# Altium PCB SensorRig.PcbDoc
Units mil, origin at the board's own origin, x right, y up, seen from the top; angles counter-clockwise.
Board outline 1023.62 x 1358.27 mil, 2 copper layers (Top Layer, Bottom Layer); 29 components, 26 nets, 119 pads, 5 vias.
Unrouted connection lines stored in the file: 65.
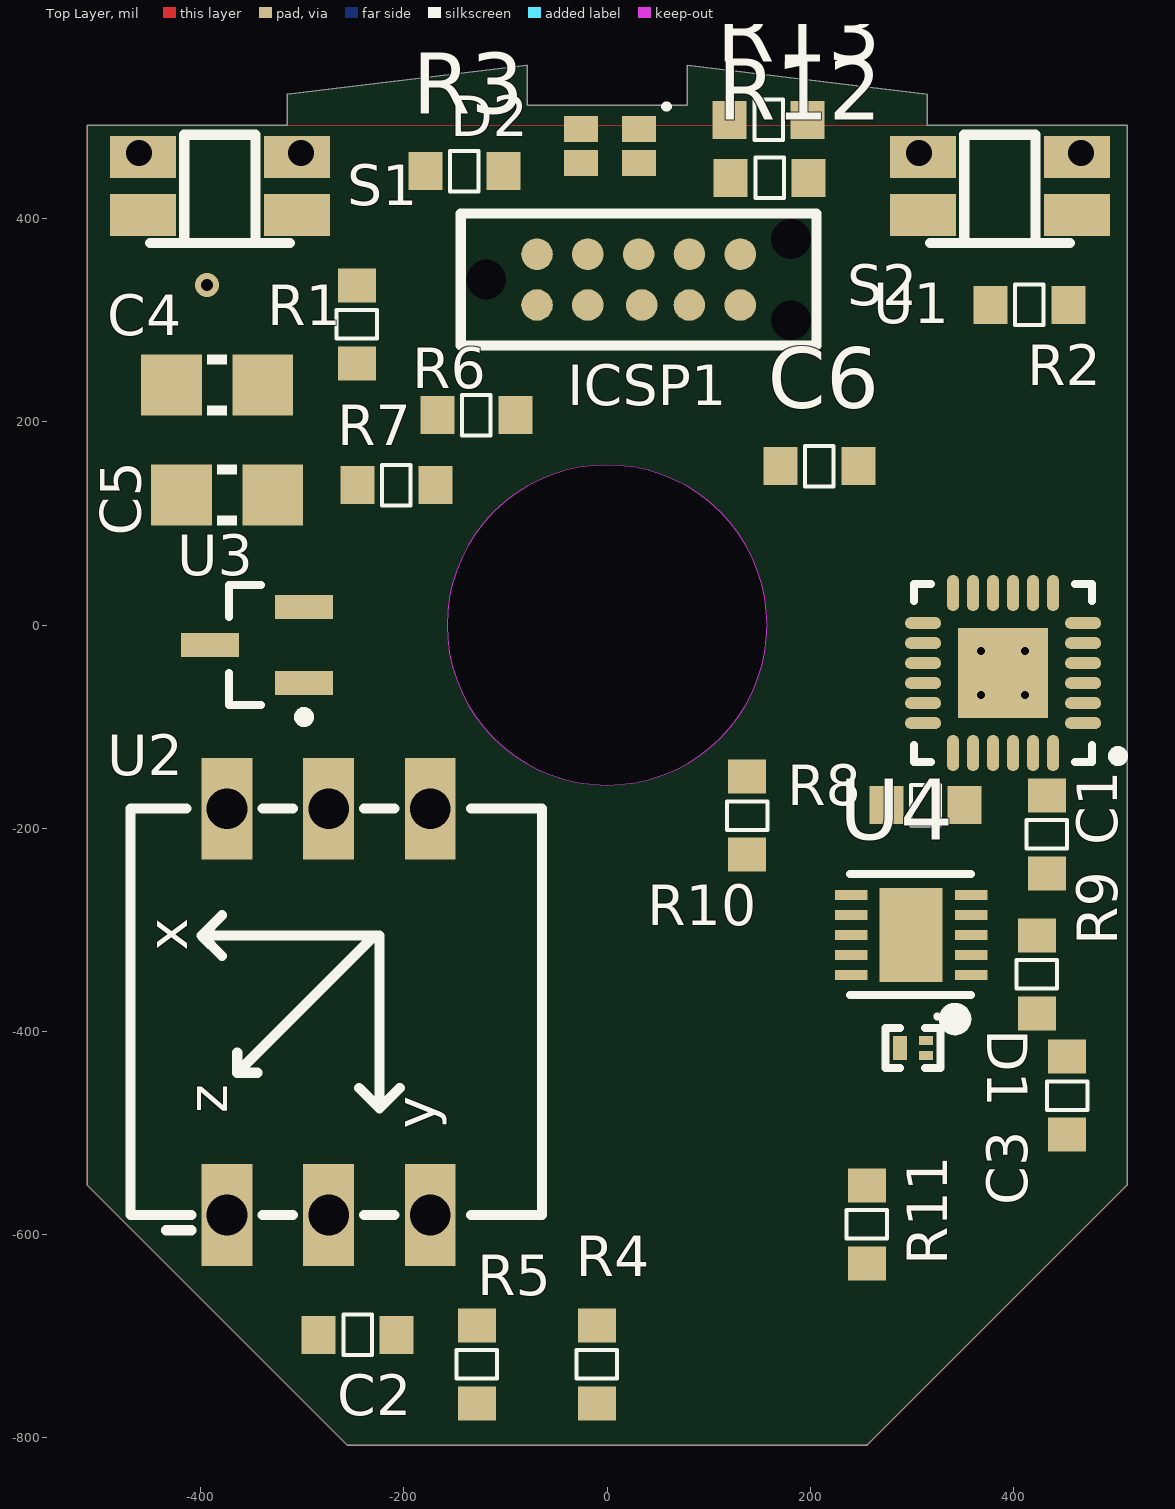
[diagram p0: Top Layer view]
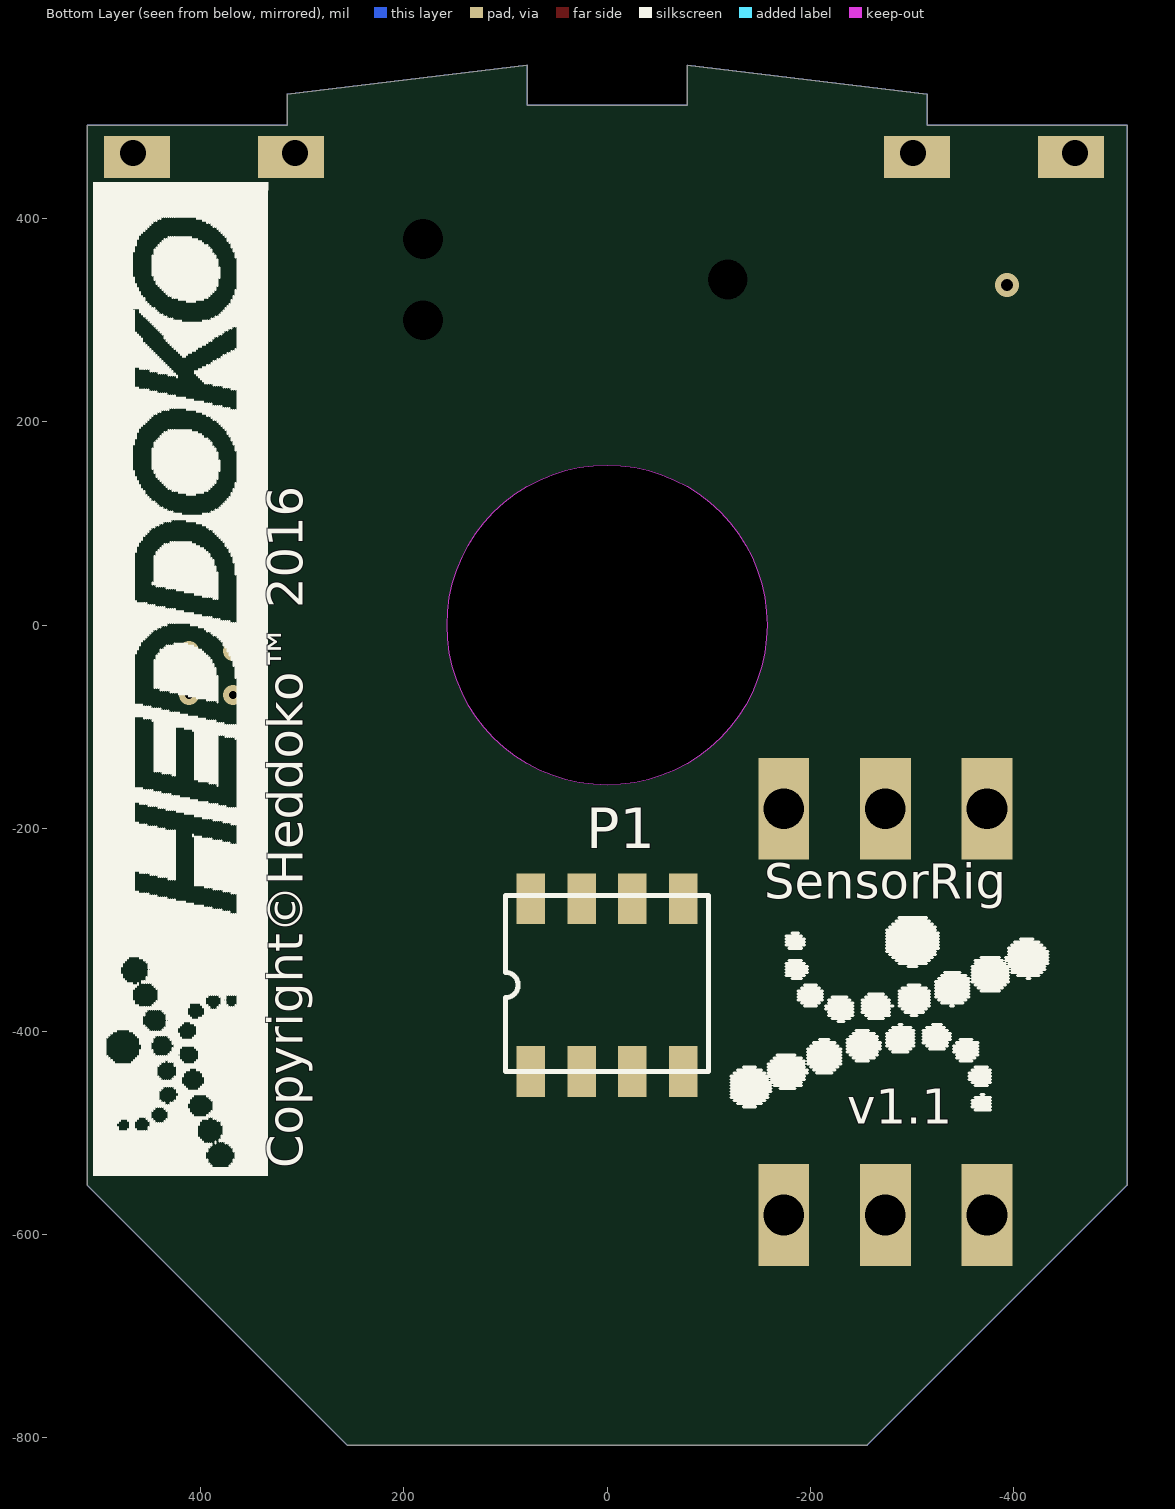
[diagram p1: Bottom Layer view, seen from below]

## Layer stack, top to bottom
Top Solder: solder mask 0.4, Solder Resist, Dk 3.5
Top Layer: signal copper 1.4
Dielectric 1: dielectric 12.6, FR-4, Dk 4.8
Bottom Layer: signal copper 1.4
Bottom Solder: solder mask 0.4, Solder Resist, Dk 3.5

## Board outline
511.81,492.13 511.81,-551.18 255.91,-807.09 -255.91,-807.09 -511.81,-551.18 -511.81,492.13 -314.96,492.13 -314.96,522.18 -78.74,551.18 -78.74,511.81 78.74,511.81 78.74,551.18 314.96,522.18 314.96,492.13
cut-out: -157.48,0 ccw(c0,0) 0,-157.48 ccw(c0,0) 157.48,0 ccw(c0,0) 0,157.48 ccw(c0,0)

## Design rules (kind name [scope] priority, off if disabled: settings)
Clearance [All] p1: gap=8
PlaneConnect [All] p1: planeconnectstyle=Relief reliefexpansion=20 reliefentries=4 reliefconductorwidth=20 reliefairgap=8
PolygonConnect [All] p1: connectstyle=Relief reliefconductorwidth=10 reliefentries=4 polygonreliefangle="90 Angle" airgapwidth=10
RoutingVias [All] p1: holewidth=12 width=28 viastyle="Through Hole" minholewidth=12 minwidth=24 maxholewidth=28 maxwidth=50
SilkToSilkClearance [All] p1: silktosilkclearance=0
SolderMaskExpansion [All] p1: expansion=5
Width Width_power [InNetClass('Power')] p1: maxlimit=20 minlimit=10 preferedwidth=12
Width [All] p2: maxlimit=20 minlimit=6 preferedwidth=8
28 further rules are at their usual default settings.

## Components (designator, comment, footprint, x,y, rotation, side; value= is the part's Value field where it differs from the comment)
C1 "100nF" 0603 433.07,-206.69 r270 top
C2 "4.7uF" 0603 -246.06,-698.82 r180 top
C3 "Cap" 0603 452.76,-462.6 r90 top
C4 "" SMD0805 -383.86,236.22 r270 top
C5 "" SMD0805 -374.02,127.95 r270 top
C6 "10uF" 0603 209.65,156.5 r0 top
D1 "TVS Diode (2 Channel)" SON35P100X50-3N 301.18,-416.34 r90 top
D2 "LED2_RGB" "LED RGB" 2.95,471.46 r180 top
ICSP1 "TC2050" TagConnect -68.9,314.96 r0 top
P1 "Conn4pin" "BOURNS 70AB/MALE (4 CONN)" 0,-354.33 r90 bottom
R1 "" 0603 -246.06,295.28 r270 top
R2 "" 0603 415,314.96 r180 top
R3 "" 0603 -139.76,446.85 r0 top
R4 "" 0603 -9.84,-728.35 r270 top
R5 "" 0603 -127.95,-728.35 r270 top
R6 "" 0603 -127.95,206.69 r0 top
R7 "" 0603 -206.69,137.8 r0 top
R8 "" 0603 314.17,-177.17 r0 top
R9 "" 0603 423.23,-344.49 r270 top
R10 "" 0603 137.8,-187.01 r90 top
R11 "" 0603 255.91,-590.55 r270 top
R12 "" 0603 159.45,439.96 r180 top
R13 "" 0603 158.46,497.05 r180 top
S1 "PB2" PTS840 -305.12,403.54 r180 top
S2 "PB2" PTS840 462.6,403.54 r180 top
U1 "M0" QFN50P400X400X80_HS-25N 389.76,-47.24 r180 top
U2 "EM7180SFP" EM7180SFP -374.02,-580.71 r90 top
U3 "AP7333" SOT23-3 -344.49,-19.68 r180 top
U4 "RS485" DFN10_3X3MM 299.21,-305.12 r90 top

## Footprints (in the part's own frame and the unit in brackets; to place one, negate y for a bottom-side part, rotate by r counter-clockwise, add the part's x,y. Pads: shape width x height; smd on the part's side, far side on the other; paste and mask are expansions set on the pad)
0603 [mm] "SMT  0603"
  rect 0.85x0.95 smd: 1(-0.992,-0.003) 2(0.958,-0.003)
  silkscreen extent -0.38,-0.51 0.34,0.5, body extent -0.89,-0.43 0.86,0.42, height 1
"BOURNS 70AB/MALE (4 CONN)" [mil]
  rect 50x28 smd: 1(-85,75) 1(85,75) 2(-85,25) 2(85,25) 3(-85,-25) 3(85,-25) 4(-85,-75) 4(85,-75)
  silkscreen extent -85,-100 88,100, body extent -95,-112 102,111, height 125
DFN10_3X3MM [mil]
  rect 92.52x62.2 smd: 0(0,0)
  rect 10x32 smd: 1(-39.37,-59.06) 2(-19.68,-59.06) 3(0,-59.06) 4(19.68,-59.06) 5(39.37,-59.06) 6(39.37,59.06) 7(19.68,59.06) 8(0,59.06) 9(-19.68,59.06) 10(-39.37,59.06)
  silkscreen extent -91,-59 60,60
EM7180SFP [mil] "EM Micro IMU"
  rect 100x50 hole 40: 1(0,0) 2(0,-100) 3(0,-200) 4(400,-200) 5(400,-100) 6(400,0)
  silkscreen extent -15,-310 400,95, body extent -3,-315 405,100, height 79
"LED RGB" [mm] "160-2162-1-ND"
  rect 0.85x0.65 smd: 1(-0.725,-0.425) 2(-0.725,0.425) 3(0.725,0.425) 4(0.725,-0.425)
  silkscreen extent -1.42,-0.99 -1.4,-0.99, body extent -1.11,-0.75 1.16,0.75, height 1
PTS840 [mm] "Switch"
  rect 1.65x1.05 smd: 1(0,0) 1(3.85,0)
  rect 1.65x1.05 hole 0.65 copper offset 0.1,0.1: 2(-0.1,-1.55)
  rect 1.65x1.05 hole 0.65 copper offset -0.1,0.1: 2(3.95,-1.549)
  silkscreen extent 0.18,-2.01 3.67,0.7, body extent 0.18,-2.85 3.67,0.7, height 1.5
QFN50P400X400X80_HS-25N [mm] "QFN, 24-Leads, Body 4.00x4.00mm, Pitch 0.50mm, Thermal Pad 2.25x2.25mm, IPC Medium Density"
  oval 0.9x0.3 smd: 1(-2,1.25) 2(-2,0.75) 3(-2,0.25) 4(-2,-0.25) 5(-2,-0.75) 6(-2,-1.25) 13(2,-1.25) 14(2,-0.75) 15(2,-0.25) 16(2,0.25) 17(2,0.75) 18(2,1.25)
  oval 0.3x0.9 smd: 7(-1.25,-2) 8(-0.75,-2) 9(-0.25,-2) 10(0.25,-2) 11(0.75,-2) 12(1.25,-2) 19(1.25,2) 20(0.75,2) 21(0.25,2) 22(-0.25,2) 23(-0.75,2) 24(-1.25,2)
  rect 2.25x2.25 smd: 25(0,0)
  silkscreen extent -3,-2.22 2.22,2.22, body extent -2.07,-2.07 2.07,2.07, height 0.8
SMD0805 [mil]
  rect 60x60 smd: 1(0,45) 2(0,-45)
  silkscreen extent -30,-10 30,10, body extent -29,-43 29,43, height 43
SON35P100X50-3N [mm] "SON, 3-Leads, Body 2.00x1.00mm, Pitch 0.35mm, IPC Medium Density"
  rect 0.225x0.35 smd: 1(-0.188,-0.325) 2(0.188,-0.325)
  rect 0.6x0.35 smd: 3(0,0.325)
  silkscreen extent -0.5,-0.69 0.84,0.69, body extent -0.3,-0.5 0.3,0.5, height 0.5
SOT23-3 [mm] "SOT23-3 MEDIUM DENSITY"
  rect 1.45x0.6 smd: 1(-1.175,0.95) 2(-1.175,-0.95) 3(1.175,0)
  silkscreen extent -1.3,-1.5 0.7,1.92, body extent -0.7,-1.5 0.7,1.5, height 1.1
TagConnect [mm]
  round 0.9 hole 0.995 unplated: 0(-1.27,0.635) 0(6.35,-0.381) 0(6.35,1.651)
  round 0.79 smd paste-0.39: 1(0,0) 2(1.27,0) 3(2.62,0) 4(3.81,0) 5(5.08,0) 6(5.08,1.27) 7(3.81,1.27) 8(2.54,1.27) 9(1.27,1.27) 10(0,1.27)
  silkscreen extent -1.9,-1.02 6.99,2.29

## Part data
C1 C2 C6: library part Cap, "Capacitor"
C3: "Capacitor"
C4 C5: library part A01-0492
D2: "RGB Led"
ICSP1: "ICSP Header"
R1 R2 R3 R4 R5 R6 R7 R8 R9 R10 R11 R12 R13: library part Res3, "Resistor"
S1 S2: library part "SW PUSHBUTTON", "SWITCH TACT 2.36MM SILV J-LEAD"
U1: library part SAMD10, "Atmel SamD10 or SamD09"
U3: "3.3 V regulator"
U4: library part RS485_Tranceiver_10pin, "RS-485 Transceivers with Low-Voltage Logic Interface"

## Via types
v1: diameter 19.68, hole 7.87, Top Layer to Bottom Layer, 4 vias
v2: diameter 24, hole 12, Top Layer to Bottom Layer, 1 vias

## Nets (pads, with @x,y where several pads share a name; then routed paths per layer and width w, separated by ;. In a path a pad name is that pad's centre, name@x,y a point inside that pad or via, vN(x,y) a via of type N, cw(c..) or ccw(c..) an arc to the next point about the centre after c; other vN are vias at no path point)
BLUELED: R3.1 U1.5
D_EN: R8.1 U1.2 U4.3
GND: C1.1 C2.1 C3.1 C4.2 C5.2 C6.1 D1.3 ICSP1.3 P1.4 R7.1 R10.1 S1.2 S2.2 U1.23 U2.6 U3.3 U4.0 U4.6 U4.7
GREENLED: R12.1 U1.4
INT: U1.6 U2.4
NetD2_1: D2.1 R13.2
NetD2_2: D2.2 R12.2
NetD2_3: D2.3 R3.2
R_EN: R10.2 U1.1 U4.4
REDLED: R13.1 U1.3
RESET: ICSP1.10 U1.18
RS485_A: D1.2 P1.2 R11.1 U4.8
RS485_B: D1.1 P1.3 R11.2 U4.9
RXD: R9.1 U1.22 U4.2
SA0: R6.1 R7.2 U2.5
SCL: R4.1 U1.12 U2.3
SDA: R5.1 U1.11 U2.2
SW1: R1.1 S1.1 U1.9
SW2: R2.1 S2.1 U1.10
SWDCLK: ICSP1.4 U1.19
SWDIO: ICSP1.2 U1.20
TXD: U1.21 U4.5
VCC: C1.2 C2.2 C3.2 C4.1 C5.1 D2.4 ICSP1.1 R1.2 R2.2 R4.2 R5.2 R6.2 R8.2 R9.2 U1.24 U2.1 U3.2 U4.1
VIN: C6.2 P1.1 U3.1 U4.10
XIN: U1.7
XOUT: U1.8
pads on no net: ICSP1.0 ICSP1.5 ICSP1.6 ICSP1.7 ICSP1.8 ICSP1.9 U1.13 U1.14 U1.15 U1.16 U1.17 U1.25
copper on no net:
  other v1: 368.11,-68.9 411.42,-68.9 368.11,-25.59 411.42,-25.59
  other v2: -393.7,334.65

## Polygon pours and split planes (outlines as drawn)
GND on Top Layer "Top Layer-GND" (solid, remove dead copper, shelved, pour order 2): -511.81,492.13 511.81,492.13 511.81,-551.18 255.91,-807.09 -255.91,-807.09 -511.81,-551.18 -511.81,492.13
GND on Bottom Layer "BottomLayer_GND" (solid, shelved, pour order 5): 511.81,492.13 511.81,-551.18 255.91,-807.09 -255.91,-807.09 -511.81,-551.18 -511.81,492.13 -314.96,492.13 -314.96,522.18 -78.74,551.18 -78.74,511.81 78.74,511.81 78.74,551.18 314.96,522.18 314.96,492.13

## Silkscreen, mask and mechanical layers (free items; w line width, h text height)
Top Overlay:
  lines w10: -379.02,-325.71 -399.02,-305.71 ; -379.02,-285.71 -399.02,-305.71 ; -364.02,-420.71 -364.02,-440.71 ; -344.02,-440.71 -364.02,-440.71 ; -244.02,-455.71 -224.02,-475.71 ; -204.02,-455.71 -224.02,-475.71 ; -399.02,-305.71 -224.02,-305.71 ; -364.02,-440.71 -359.02,-435.71 -229.02,-305.71 -224.02,-305.71 ; -224.02,-475.71 -224.02,-305.71
  text "x" at -413.13,-320.71 h39.37 r90
  text "z" at -374.02,-480.71 h39.37 r90
  text "y" at -169.02,-495.71 h39.37 r90
Bottom Overlay:
  drawing of 1039 lines, arcs and shapes, not listed
  text "SensorRig" at -154.53,-280.7 h59.06
  text "v1.1" at -236.22,-502.16 h59.06
  text "Copyright©Heddoko™ 2016" at 288.39,-534.45 h59.06 r270
Mechanical 1:
  rectangle: -29.53,157.48 29.53,196.85
  rectangle: -39.37,-590.55 39.37,-157.48
  rectangle: -157.48,-433.07 157.48,-353.07
  rectangle: -216.54,-29.53 -160,29.53
  rectangle: 160,-29.53 216.53,29.53
Mechanical 26:
  circle w10: c0,0 r157.48
  lines w10: -511.81,-551.18 -255.91,-807.09 255.91,-807.09 511.81,-551.18 511.81,492.13 314.96,492.13 314.96,522.18 78.74,551.18 78.74,511.81 -78.74,511.81 -78.74,551.18 -314.96,522.18 -314.96,492.13 -511.81,492.13 -511.81,-551.18

## Text inside footprints (layer, text, board x,y; h text height)
U2: Top Overlay "z" at -374.02,-480.71 h39.37 r90; Top Overlay "y" at -169.02,-495.71 h39.37 r90; Top Overlay "x" at -413.13,-320.71 h39.37 r90